# Altium PCB RX.PcbDoc (part 1 of 2)
Units mm, origin at the board's own origin, x right, y up, seen from the top; angles counter-clockwise.
Board outline 47 x 37 mm, 4 copper layers (Top Layer, Top Inner Layer, Bottom Inner Layer, Bottom Layer), stack 1.569 mm thick; 85 components, 65 nets, 311 pads, 196 vias.
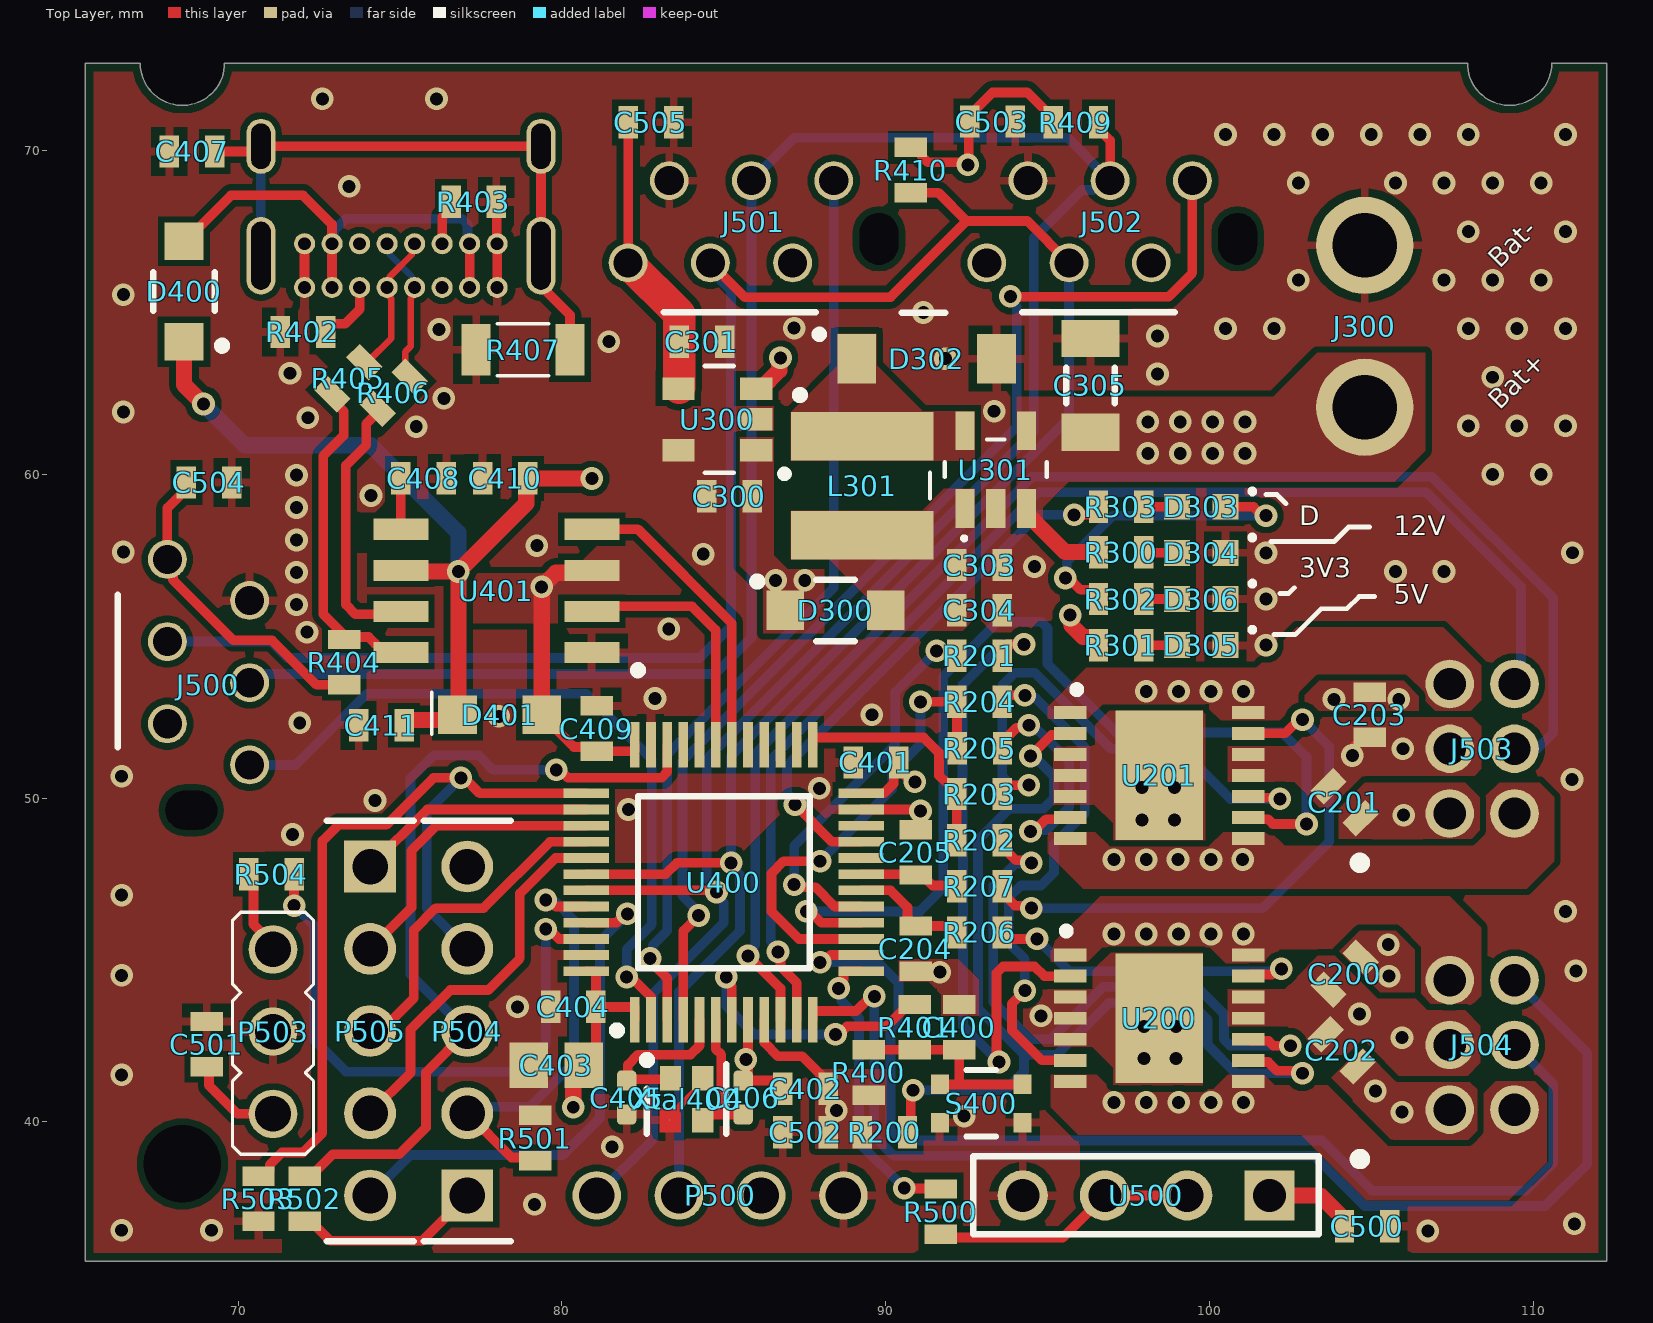
[diagram p0: Top Layer view]
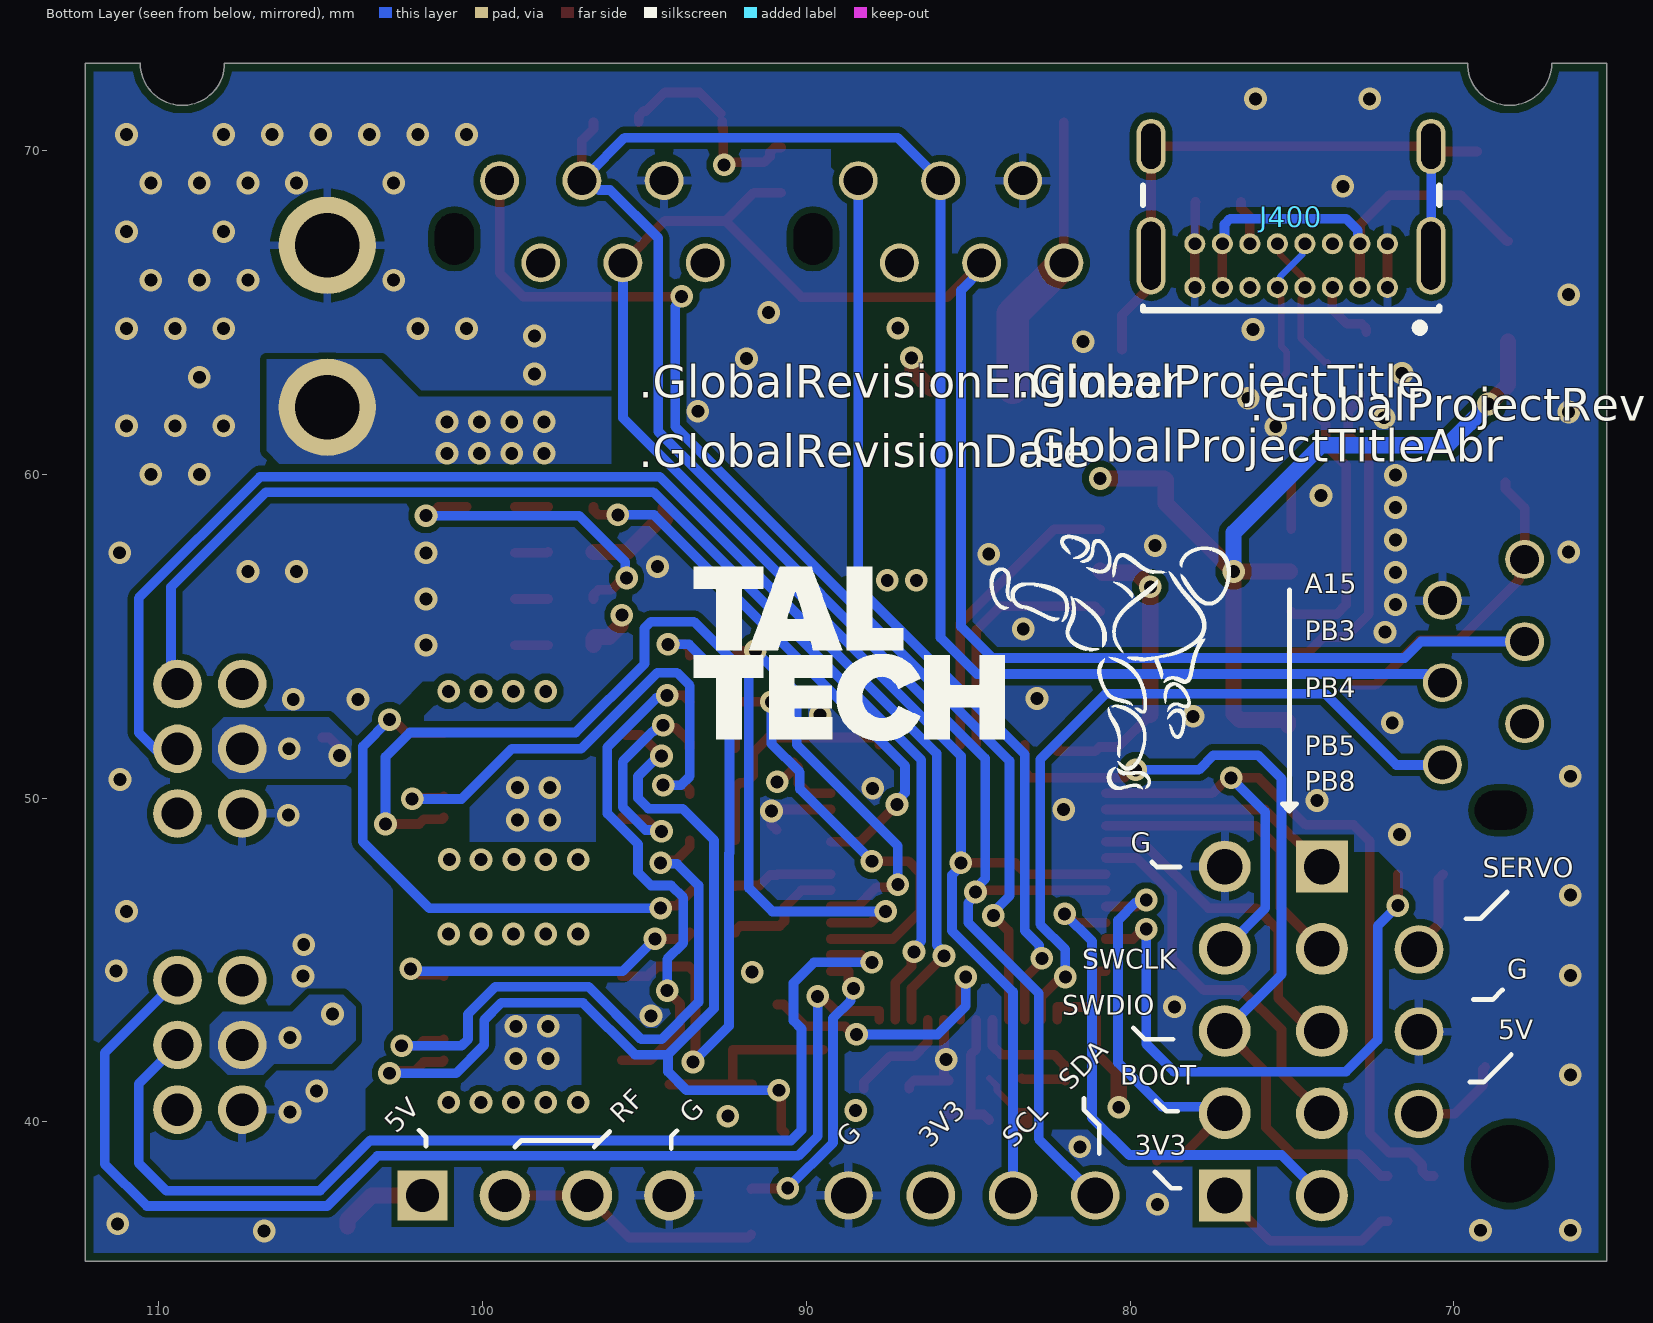
[diagram p1: Bottom Layer view, seen from below]
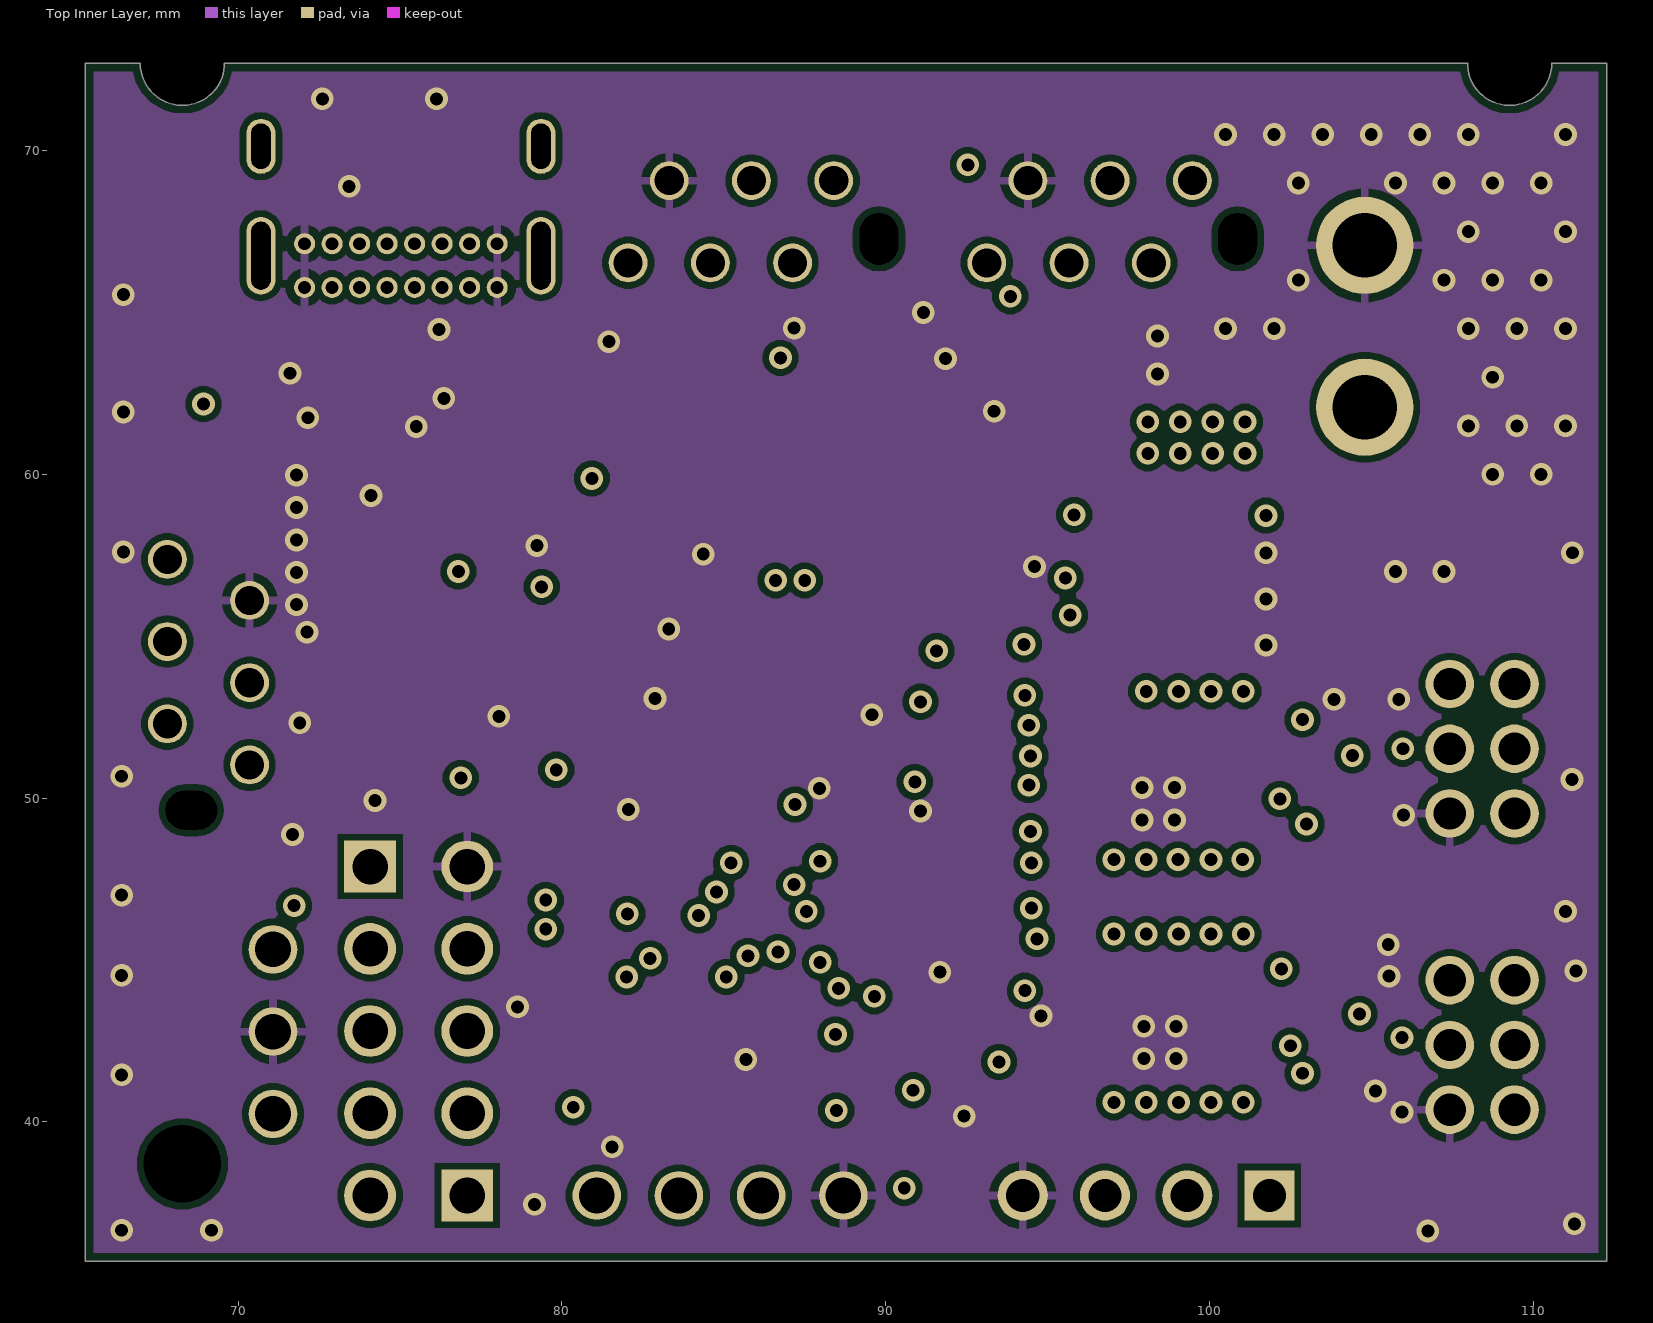
[diagram p2: Top Inner Layer]
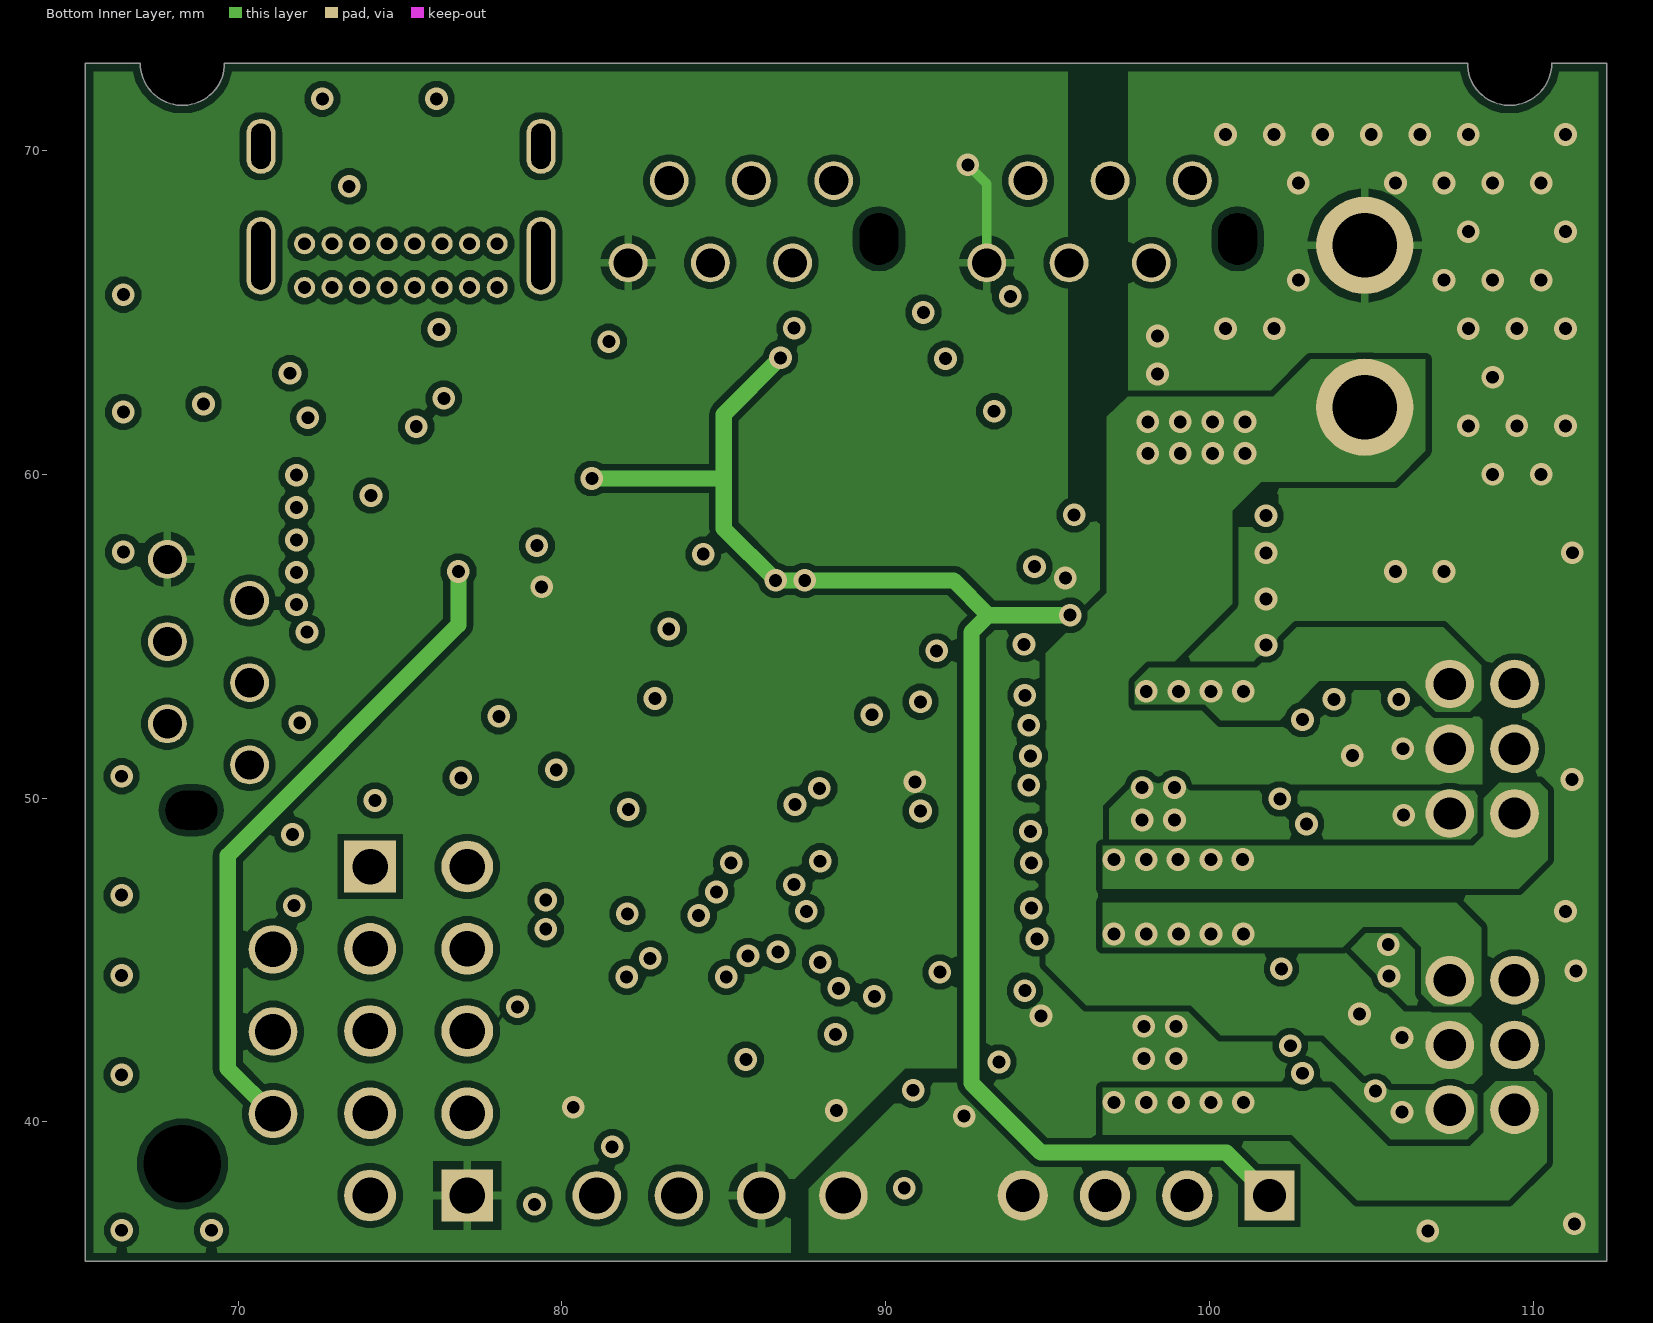
[diagram p3: Bottom Inner Layer]

## Layer stack, top to bottom
Top Solder: solder mask 0.0254, Solder Resist, Dk 3.8
Top Layer: signal copper 0.035
Dielectric 2: prepreg 0.0994, PP-006, Dk 4.1
Top Inner Layer: signal copper 0.0175
Dielectric 1: dielectric 1.265, FR-4, Dk 4.8
Bottom Inner Layer: signal copper 0.0175
Dielectric 3: prepreg 0.0994, PP-006, Dk 4.1
Bottom Layer: signal copper 0.035
Bottom Solder: solder mask 0.0254, Solder Resist, Dk 3.8

## Board outline
65.275,35.7 65.275,72.7 66.975,72.7 ccw(c68.275,72.7) 69.575,72.7 107.975,72.7 ccw(c109.275,72.7) 110.575,72.7 112.275,72.7 112.275,35.7

## Design rules (kind name [scope] priority, off if disabled: settings)
BoardOutlineClearance [All] p1: gap=0.254 ignorepadtopadclearanceinfootprint=FALSE except(0: Arc-SplitContinuation Track-SplitContinuation SMDPad-SplitContinuation THPad-SplitContinuation Via-SplitContinuation Fill-SplitContinuation Poly-SplitContinuation Region-SplitContinuation Text-SplitContinuation)
Clearance [All] p1: gap=0.2 ignorepadtopadclearanceinfootprint=TRUE except(0.1: Arc-SMDPad Track-SMDPad; 0.15: SMDPad-SMDPad; 0.16: Arc-Arc Arc-Track Track-Track; 0.3: Arc-THPad Track-THPad SMDPad-THPad THPad-THPad THPad-Via)
DiffPairsRouting [All] p1: maxlimit=0.4 minlimit=0.127 mostfreqgap=0.3 toplayer_mingap=0.2 toplayer_minwidth=0.2 toplayer_maxwidth=0.3 toplayer_prefwidth=0.25 midlayer1_maxgap=0.127 midlayer1_prefgap=0.127 midlayer1_minwidth=0.095 midlayer1_maxwidth=0.095 midlayer1_prefwidth=0.095 midlayer2_maxgap=0.127 midlayer2_prefgap=0.127 midlayer2_minwidth=0.095 midlayer2_maxwidth=0.095 midlayer2_prefwidth=0.095 bottomlayer_mingap=0.2 bottomlayer_minwidth=0.2 bottomlayer_maxwidth=0.3 bottomlayer_prefwidth=0.25 maxuncoupledlength=12.7
Height [All] p1: minheight=0 maxheight=30 prefheight=12.7
MinimumSolderMaskSliver [All] p1: minsoldermaskwidth=0
PlaneConnect [All] p1: pad.planeconnectstyle=Relief pad.reliefexpansion=0.508 pad.reliefentries=4 pad.reliefconductorwidth=0.254 pad.reliefairgap=0.254 via.planeconnectstyle=Direct via.reliefexpansion=0.508 via.reliefentries=4 via.reliefconductorwidth=0.254 via.reliefairgap=0.254
PolygonConnect MainPwr [All vs IsNamedPolygon('Main')] p1: connectstyle=Direct reliefconductorwidth=0.254 reliefentries=4 polygonreliefangle="90 Angle" airgapwidth=0.254
PolygonConnect [All] p2: thpad.connectstyle=Relief thpad.reliefconductorwidth=0.254 thpad.reliefentries=4 thpad.polygonreliefangle="90 Angle" thpad.airgapwidth=0.254 smdpad.connectstyle=Relief smdpad.reliefconductorwidth=0.254 smdpad.reliefentries=4 smdpad.polygonreliefangle="90 Angle" smdpad.airgapwidth=0.254 via.connectstyle=Direct via.reliefconductorwidth=0.254 via.reliefentries=4 via.polygonreliefangle="90 Angle" via.airgapwidth=0.254
RoutingVias [All] p1: holewidth=0.4 width=0.7 viastyle="Through Hole" minholewidth=0.3 minwidth=0.6 maxholewidth=1 maxwidth=1.5
SilkToSolderMaskClearance [IsPad] p1: minsilkscreentomaskgap=0.1 clearancetoexposedcopper=TRUE
SolderMaskExpansion IsVia [IsVia] p1: expansion=0 istentingtop=FALSE soldermaskfromhole=TRUE
SolderMaskExpansion [All] p2: expansion=0.102 istentingtop=FALSE
SupplyNets "Schematic Supply Nets_3" [InNet('+3V3')] p1: voltage=0.000
SupplyNets "Schematic Supply Nets_2" [InNet('+5V')] p2: voltage=0.000
SupplyNets "Schematic Supply Nets_1" [InNet('+12V')] p3: voltage=0.000
SupplyNets "Schematic Supply Nets" [InNet('GND')] p4: voltage=0.000
Width [All] p1: maxlimit=2 minlimit=0.16 preferedwidth=0.3
25 further rules are at their usual default settings.

## Classes and differential pairs
component class Power: C300 C301 C303 C304 C305 D300 D302 D303 D304 D305 D306 J300 L301 mx R300 R301 R302 R303 U300 U301
component class "MCU and USB-C": C400 C401 C402 C403 C404 C405 C406 C407 C408 C409 C410 C411 D400 D401 J400 R400 R401 R402 R403 R404 R405 R406 R407 R409 R410 S400 U400 U401 Xtal400
component class "Headers and Connectors": C500 C501 C502 C503 C504 C505 J500 J501 J502 J503 J504 P500 P503 P504 P505 R500 R501 R502 R503 R504 U500
component class "Motor driver": C200 C201 C202 C203 C204 C205 mx R200 R201 R202 R203 R204 R205 R206 R207 U200 U201
differential pair USB_D: +USB_D_P -USB_D_N
differential pair D: +D_P -D_N

## Components (designator, comment, footprint, x,y, rotation, side; value= is the part's Value field where it differs from the comment)
C200 "4.7u" MLCC_0603_M 104.175,44.575 r225 top value=4,7µF
C201 "4.7u" MLCC_0603_M 104.175,49.875 r135 top value=4,7µF
C202 "100n" MLCC_0603_M 104.095,42.205 r135 top value=100nF
C203 "100n" MLCC_0603_M 104.95,52.575 r270 top value=100nF
C204 "15p" MLCC_0603_M 90.925,45.35 r270 top value=15pF
C205 "15p" MLCC_0603_M 90.925,48.325 r90 top value=15pF
C300 "1u" MLCC_0603_M 85.175,59.325 r0 top value=1µF
C301 "1u" MLCC_0603_M 84.325,64.1 r180 top value=1µF
C303 "22u" MLCC_0603_M 92.9,57.2 r180 top value=22µF
C304 "22u" MLCC_0603_M 92.9,55.8 r180 top value=22µF
C305 "4.7u" MLCC_1206_M 96.325,62.75 r270 top value=4,7µF
C400 "100n" MLCC_0603_M 92.275,42.925 r270 top value=100nF
C401 "100n" MLCC_0603_M 89.7,51.1 r180 top value=100nF
C402 "100n" MLCC_0603_M 87.525,41.025 r180 top value=100nF
C403 "4.7u" MLCC_0805_M 79.825,41.75 r0 top value=4.7µF
C404 "100n" MLCC_0603_M 80.35,43.55 r180 top value=100nF
C405 "15p" MLCC_0402_M 82,40.75 r90 top value=15pF
C406 "15p" MLCC_0402_M 85.6,40.75 r270 top value=15pF
C407 "1n" MLCC_0603_M 68.575,69.975 r0 top value=1nF
C408 "1u" MLCC_0603_M 75.725,59.875 r0 top value=1µF
C409 "100n" MLCC_0603_M 81.075,52.15 r90 top value=100nF
C410 "1u" MLCC_0603_M 78.25,59.875 r0 top value=1µF
C411 "100n" MLCC_0603_M 74.425,52.25 r180 top value=100nF
C500 "100n" MLCC_0603_M 104.875,36.775 r0 top value=100nF
C501 "100n" MLCC_0603_M 69.025,42.4 r90 top value=100nF
C502 "100n" MLCC_0603_M 87.525,39.675 r180 top value=100nF
C503 "100n" MLCC_0603_M 93.3,70.9 r0 top value=100nF
C504 "100n" MLCC_0603_M 69.1,59.75 r0 top value=100nF
C505 "100n" MLCC_0603_M 82.75,70.875 r0 top value=100nF
D300 "MBR1020VL_R1_00001" FP-MBR1020VL_R1_00001-MFG 88.45,55.8 r0 top
D302 "VSSAF3M10HM3/H" VSSAF3M10HM3_H-Footprint-1 91.265,63.575 r0 top
D303 "Red" "0603 RED LED" 99.75,59 r0 top
D304 "Red" "0603 RED LED" 99.75,57.575 r0 top
D305 "Red" "0603 RED LED" 99.75,54.725 r0 top
D306 "Red" "0603 RED LED" 99.75,56.15 r0 top
D400 "MBR1020VL_R1_00001" FP-MBR1020VL_R1_00001-MFG 68.325,65.65 r90 top
D401 "1N5817G" "SOD-323 based on 1N5817WS" 78.075,52.575 r0 top
J300 "XT30U-F" XT30U-F 104.8,64.575 r180 top
J400 "USB4085-GF-A" FP-USB4085-GF-A-MFG 75.025,69.8 r0 bottom
J500 "7-215079-6" 7-215079-6-Footprint-1 67.81,57.375 r270 top
J501 "7-215079-6" 7-215079-6-Footprint-1 82.045,66.535 r0 top
J502 "7-215079-6" 7-215079-6-Footprint-1 93.125,66.535 r0 top
J503 "0878310641" 0878310641 108.425,51.525 r90 top
J504 "0878310641" 0878310641 108.425,42.375 r90 top
L301 "74404043220A" WE-LQS_4025 89.275,59.65 r270 top value=22µH
P500 "PH1-04-UA" "4Pos Pin Header Vertical" 84.885,37.725 r180 top
P503 "M20-9990345" "3Pos Pin Header" 71.075,42.805 r90 top
P504 "61300511121" 61300511121 77.075,42.805 r90 top
P505 "61300511121" 61300511121 74.075,42.805 r270 top
R200 "2k" Resistor_0603_M 89.975,39.675 r180 top
R201 "22R" Resistor_0603_M 92.9,54.4 r0 top value=22
R202 "22R" Resistor_0603_M 92.9,48.7 r0 top value=22
R203 "22R" Resistor_0603_M 92.9,50.125 r0 top value=22
R204 "22R" Resistor_0603_M 92.9,52.975 r0 top value=22
R205 "22R" Resistor_0603_M 92.908,51.544 r0 top value=22
R206 "22R" Resistor_0603_M 92.9,45.85 r0 top value=22
R207 "22R" Resistor_0603_M 92.9,47.275 r0 top value=22
R300 "680R" Resistor_0603_M 97.275,57.6 r180 top value=680
R301 "200R" Resistor_0603_M 97.275,54.725 r0 top value=200
R302 "100R" Resistor_0603_M 97.275,56.15 r180 top value=100
R303 "200R" Resistor_0603_M 97.275,59 r0 top value=200
R400 "10k" Resistor_0603_M 89.475,41.525 r270 top
R401 "100R" Resistor_0603_M 90.9,42.925 r90 top value=100
R402 "5.1k" Resistor_0603_M 72,64.4 r180 top value=5,1k
R403 "5.1k" Resistor_0603_M 77.275,68.425 r180 top value=5,1k
R404 "1.5k" Resistor_0603_M 73.275,54.2 r270 top value=1,5k
R405 "22R" Resistor_0603_M 73.4,62.975 r225 top value=22
R406 "22R" Resistor_0603_M 74.8,62.525 r225 top value=22
R407 "1M" Resistor_1206_M 78.8,63.85 r180 top
R409 "4.7k" Resistor_0603_M 95.875,70.875 r180 top value=4,7k
R410 "4.7k" Resistor_0603_M 90.775,69.4 r90 top value=4,7k
R500 "22R" Resistor_0603_M 91.7,37.225 r270 top value=22
R501 "10k" Resistor_0603_M 79.175,39.5 r270 top
R502 "10k" Resistor_0603_M 72.05,37.625 r90 top
R503 "10k" Resistor_0603_M 70.625,37.625 r90 top
R504 "100R" Resistor_0603_M 71.025,47.65 r0 top value=100
S400 "USLPT2819DT4TR" USLPT2819DT4TR-Footprint-1 92.95,40.575 r180 top
U200 "BTM9011EPXUMA1" BTM9011EPXUMA1 98.45,43.2 r0 top
U201 "BTM9011EPXUMA1" BTM9011EPXUMA1 98.45,50.7 r0 top
U300 "NCP115ASN330T2G" TSOP-5 84.8,61.7 r180 top
U301 "RAA2118054GP3#JA0" P5_064B_MFG 93.4,60.15 r90 top
U400 "STM32F103C8T6" STM-LQFP48_M 85,47.4 r90 top
U401 "HT42B534-2" "SOP-8 150mil" 77.975,56.4 r180 top
U500 "XY-MK-5V RF" "2.54mm 4 POS XY-MK-5V RF" 101.855,37.725 r180 top
Xtal400 "ABM11-16.000MHZ-12-N1G-T" FP-ABM11-MFG 83.85,40.7 r270 top

## Footprints (in the part's own frame and the unit in brackets; to place one, negate y for a bottom-side part, rotate by r counter-clockwise, add the part's x,y. Pads: shape width x height; smd on the part's side, far side on the other; paste and mask are expansions set on the pad)
"2.54mm 4 POS XY-MK-5V RF" [mm] "Elevated Socket, 1x5 Pins, Vertical, 2.54mm Pitch, Female"
  rect 1.55x1.55 hole 1.02: 1(0,0)
  round 1.55 hole 1.02: 2(2.54,0) 3(5.08,0) 4(7.62,0)
  silkscreen extent -1.53,-1.2 9.14,1.2, body extent -20.98,2.21 9.02,21.41, height 6.1
"3Pos Pin Header" [mm]
  round 1.5 hole 1.1: 1(-2.56,0) 2(-0.02,0) 3(2.52,0)
  silkscreen extent -3.81,-1.25 3.67,1.25, body extent -3.89,-1.24 3.73,1.25, height 8.57
"4Pos Pin Header Vertical" [mm]
  round 1.5 hole 1.1: 1(-3.81,0) 2(-1.27,0) 3(1.27,0) 4(3.81,0)
  body extent -5.08,-1.27 5.08,1.27, height 8.57
7-215079-6-Footprint-1 [mm]
  round 0 hole 1.2 slot 1.6 at 90 deg unplated: 0(7.75,0.74)
  round 1.2 hole 0.9: 1(0,0) 2(1.27,2.54) 3(2.54,0) 4(3.81,2.54) 5(5.08,0) 6(6.35,2.54)
  silkscreen extent 1.1,-1.53 5.8,-1.53, body extent -1.6,-1.38 7.96,3.62, height 4
"0603 RED LED" [mm] "Generic 0603 RED LED"
  rect 0.8x0.8 smd: 1(0.75,0) 2(-0.75,0)
  silkscreen extent 1.55,0.45 1.6,0.5, body extent -0.8,-0.4 0.8,0.4, height 0.4
0878310641 [mm]
  round 1.5 hole 1: 1(-2,1) 2(0,1) 3(2,1) 4(-2,-1) 5(0,-1) 6(2,-1)
  silkscreen extent -3.67,3.62 -3.38,3.92, body extent -4.31,-3.14 4.34,3.16, height 6.4
61300511121 [mm] "Pin Header, pitch 2.54 mm, THT, Vertical, single row, 5p"
  rect 1.6x1.6 hole 1.1: 1(-5.08,0)
  round 1.6 hole 1.1: 2(-2.54,0) 3(0,0) 4(2.54,0) 5(5.08,0)
  silkscreen extent -6.5,-1.35 6.5,1.35, body extent -6.35,-1.27 6.35,1.27, height 8.57
BTM9011EPXUMA1 [mm]
  rect 1x0.4 smd: 1(-2.75,1.95) 2(-2.75,1.3) 3(-2.75,0.65) 4(-2.75,0) 5(-2.75,-0.65) 6(-2.75,-1.3) 7(-2.75,-1.95) 8(2.75,-1.95) 9(2.75,-1.3) 10(2.75,-0.65) 11(2.75,0) 12(2.75,0.65) 13(2.75,1.3) 14(2.75,1.95)
  rect 2.7x4 smd: 15(0,0)
  silkscreen extent -2.97,2.59 -2.77,2.8, body extent -3,-2.45 3,2.45, height 1.16
FP-ABM11-MFG [mm]
  rect 0.75x0.65 smd paste+0 mask+0: 1(-0.65,-0.5) 3(0.65,0.5) 4(-0.65,0.5)
  round 0.025 smd paste+0 mask+0: 2(0.65,-0.525)
  Top Layer region: 0.275,-0.325 0.425,-0.175 1.025,-0.175 1.025,-0.825 0.275,-0.825
  silkscreen extent -1.33,-1.35 1.07,1.22, body extent -1.17,-0.97 1.17,0.97, height 0.25
FP-MBR1020VL_R1_00001-MFG [mm]
  rect 1.15x1.22 smd paste+0 mask+0: 1(-1.55,0) 2(1.55,0)
  silkscreen extent -2.54,-0.95 0.6,1.01, body extent -2.22,-1.05 2.22,1.05, height 0.25
FP-USB4085-GF-A-MFG [mm]
  rrect100% 0.9x2.4 hole 2.1 slot 0.6 at 0 deg paste-2539.97 mask+0: 1(-4.325,3.045) 2(4.325,3.045)
  rrect100% 0.9x1.7 hole 1.4 slot 0.6 at 0 deg paste-2539.97 mask+0: 3(-4.325,-0.335) 4(4.325,-0.335)
  round 0.65 hole 0.4 paste-2539.97 mask+0: A1(-2.975,4.025) A4(-2.125,4.025) A5(-1.275,4.025) A6(-0.425,4.025) A7(0.425,4.025) A8(1.275,4.025) A9(2.125,4.025) A12(2.975,4.025) B1(2.975,2.675) B4(2.125,2.675) B5(1.275,2.675) B6(0.425,2.675) B7(-0.425,2.675) B8(-1.275,2.675) B9(-2.125,2.675) B12(-2.975,2.675)
  silkscreen extent -4.57,0.89 4.57,5.39, body extent -4.51,-4.6 4.51,4.57, height 3.46
MLCC_0402_M [mm]
  rrect49% 0.63x0.61 smd: 1(-0.525,0) 2(0.525,0)
  body extent -0.5,-0.25 0.5,0.25, height 0.55
MLCC_0603_M [mm]
  rect 0.6x1 smd: 1(-0.7,0) 2(0.7,0)
  body extent -0.8,-0.4 0.8,0.4, height 0.92
MLCC_0805_M [mm] "Chip Capacitor, 2-Leads, Body 2,00x1,25mm, IPC Medium Density"
  rect 1.2x1.4 smd: 1(-0.85,0) 2(0.85,0)
  body extent -1.05,-0.67 1.05,0.67, height 1.35
MLCC_1206_M [mm]
  rect 1.15x1.8 smd: 1(-1.45,0) 2(1.45,0)
  silkscreen extent -0.55,-0.75 0.55,0.75, body extent -1.7,-0.9 1.7,0.9, height 0.75
P5_064B_MFG [mm] "Recommended Land Pattern"
  rect 1.2x0.6 smd paste+0 mask+0: 1(-1.2,0.95) 2(-1.2,0) 3(-1.2,-0.95) 4(1.2,-0.95) 5(1.2,0.95)
  silkscreen extent -2.19,-1.58 0.92,1.58, body extent -1.4,-1.45 1.4,1.45, height 1.1
Resistor_0603_M [mm]
  rect 0.6x1 smd: 1(-0.7,0) 2(0.7,0)
  body extent -0.8,-0.4 0.8,0.4, height 0.45
Resistor_1206_M [mm]
  rect 0.9x1.6 smd: 1(-1.45,0) 2(1.45,0)
  silkscreen extent -0.8,-0.8 0.8,0.8, body extent -1.6,-0.83 1.6,0.83, height 0.56
"SOD-323 based on 1N5817WS" [mm] "SOD-323 based on 1N5817WS"
  rect 1.2x1.2 smd: 1(-1.3,0) 2(1.3,0)
  silkscreen extent -2.1,-0.6 -2.1,0.7, body extent -1.3,-0.67 1.3,0.68, height 1.1
"SOP-8 150mil" [mm]
  rect 1.7x0.65 smd: 1(-2.95,1.905) 2(-2.95,0.635) 3(-2.95,-0.635) 4(-2.95,-1.905) 5(2.95,-1.905) 6(2.95,-0.635) 7(2.95,0.635) 8(2.95,1.905)
  silkscreen extent -4.5,2.33 -4.25,2.57, body extent -3.1,-2.5 3.1,2.5, height 1.83
STM-LQFP48_M [mm] "QFP, 48-Leads, Body 7x7mm, Pitch 0.5mm, IPC Low Density"
  rect 1.4x0.3 smd: 1(-4.25,2.75) 2(-4.25,2.25) 3(-4.25,1.75) 4(-4.25,1.25) 5(-4.25,0.75) 6(-4.25,0.25) 7(-4.25,-0.25) 8(-4.25,-0.75) 9(-4.25,-1.25) 10(-4.25,-1.75) 11(-4.25,-2.25) 12(-4.25,-2.75) 25(4.25,-2.75) 26(4.25,-2.25) 27(4.25,-1.75) 28(4.25,-1.25) 29(4.25,-0.75) 30(4.25,-0.25) 31(4.25,0.25) 32(4.25,0.75) 33(4.25,1.25) 34(4.25,1.75) 35(4.25,2.25) 36(4.25,2.75)
  rect 0.3x1.4 smd: 13(-2.75,-4.25) 14(-2.25,-4.25) 15(-1.75,-4.25) 16(-1.25,-4.25) 17(-0.75,-4.25) 18(-0.25,-4.25) 19(0.25,-4.25) 20(0.75,-4.25) 21(1.25,-4.25) 22(1.75,-4.25) 23(2.25,-4.25) 24(2.75,-4.25) 37(2.75,4.25) 38(2.25,4.25) 39(1.75,4.25) 40(1.25,4.25) 41(0.75,4.25) 42(0.25,4.25) 43(-0.25,4.25) 44(-0.75,4.25) 45(-1.25,4.25) 46(-1.75,4.25) 47(-2.25,4.25) 48(-2.75,4.25)
  silkscreen extent -4.7,-2.65 2.65,3.42, body extent -3.5,-3.5 3.5,3.5, height 1.6
TSOP-5 [mm] "SOT-23-5, 5-Leads, Body 3.0x1.5mm, Pitch 0.95mm, IPC High Density"
  rect 1x0.7 smd: 1(-1.2,0.95) 2(-1.2,0) 3(-1.2,-0.95) 4(1.2,-0.95) 5(1.2,0.95)
  silkscreen extent -2.17,-1.65 0.38,1.78, body extent -1.38,-1.47 1.37,1.53, height 1.1
USLPT2819DT4TR-Footprint-1 [mm]
  rect 0.55x0.6 smd: 1(-1.275,0.6) 2(1.275,0.6) 3(-1.275,-0.59) 4(1.275,-0.59)
  silkscreen extent -0.46,-1.02 0.46,1.03, body extent -1.5,-0.94 1.5,0.96, height 0.43
VSSAF3M10HM3_H-Footprint-1 [mm]
  rect 1.2x1.52 smd: 1(-2.16,0) 2(2.16,0)
  silkscreen extent -3.43,0.64 0.58,1.43, body extent -2.59,-1.29 2.61,1.31, height 1
WE-LQS_4025 [mm] "SMD Power Inductor, 2-Leads, body 4x4mm"
  rect 1.5x4.4 smd: 1(-1.525,0) 2(1.525,0)
  silkscreen extent -0.4,2.1 0.4,2.1, body extent -2,-2 2,2, height 2.15
XT30U-F [mm]
  round 3 hole 2: 1(0,2.5) 2(0,-2.5)
  body extent -2.8,-5.44 2.82,5.43, height 9.67

## Part data
C200 C201: library part CMP-001-1257-1, "MLCC, 0603, 4.7u, 10%, 35V, X5R", Capacitor Type=Ceramic, Case/Package=0603, Dielectric=X5R, Manufacturer=Any, Tolerance=10%, Voltage=35V, Mount=SMD, Part number="MLCC, 0603, 4.7u, 10%, 35V, X5R", RoHS=Yes
C202 C203: library part CMP-001-0755-1, "MLCC, 0603, 100n, 10%, 35V, X7R", Capacitor Type=Ceramic, Case/Package=0603, Dielectric=X7R, Manufacturer=Any, Tolerance=10%, Voltage=35V, Mount=SMD, Part number="MLCC, 0603, 100n, 10%, 35V, X7R", RoHS=Yes
C204 C205: library part CMP-001-0474-1, "MLCC, 0603, 15p, 5%, 50V, C0G/NP0", Capacitor Type=Ceramic, Case/Package=0603, Dielectric=C0G/NP0, Manufacturer=Any, Tolerance=5%, Voltage=50V, Mount=SMD, Part number="MLCC, 0603, 15p, 5%, 50V, C0G/NP0", RoHS=Yes
C300 C301 C408 C410: library part CMP-001-0565-1, "MLCC, 0603, 1u, 10%, 50V, X5R", Capacitor Type=Ceramic, Case/Package=0603, Dielectric=X5R, Manufacturer=Any, Tolerance=10%, Voltage=50V, Mount=SMD, Part number="MLCC, 0603, 1u, 10%, 50V, X5R", RoHS=Yes
C303 C304: library part CMP-001-1264-1, "MLCC, 0603, 22u, 10%, 16V, X5R", Capacitor Type=Ceramic, Case/Package=0603, Dielectric=X5R, Manufacturer=Any, Tolerance=10%, Voltage=16V, Mount=SMD, Part number="MLCC, 0603, 22u, 10%, 16V, X5R", RoHS=Yes
C305: library part CMP-001-1124-2, "MLCC, 1206, 4.7u, 10%, 35V, X5R", Capacitor Type=Ceramic, Case/Package=1206, Dielectric=X5R, Manufacturer=Any, Tolerance=10%, Voltage=35V, Mount=SMD, Part number="MLCC, 1206, 4.7u, 10%, 35V, X5R", RoHS=Yes
C400 C401 C402 C404 C409 C411 C500 C501 C502 C503 C504 C505: library part CMP-001-0815-1, "MLCC, 0603, 100n, 10%, 50V, X7R", Capacitor Type=Ceramic, Case/Package=0603, Dielectric=X7R, Manufacturer=Any, Tolerance=10%, Voltage=50V, Mount=SMD, Part number="MLCC, 0603, 100n, 10%, 50V, X7R", RoHS=Yes
C403: library part CMP-001-1830-1, "MLCC, 0805, 4.7u, 20%, 50V, X5R", Capacitor Type=Ceramic, Case/Package=0805, Dielectric=X5R, Manufacturer=Any, Tolerance=20%, Voltage=50V, Mount=SMD, Part number="MLCC, 0805, 4.7u, 20%, 50V, X5R", RoHS=Yes
C405 C406: library part CMP-001-1853-1, "MLCC, 0402, 15p, 10%, 25V, C0G/NP0", Capacitance=15pF, Capacitor Type=Ceramic, Case Code (Imperial)=0402, Case Code (Metric)=1005, Dielectric=C0G, Manufacturer=Any, Max Operating Temperature=125°C, Min Operating Temperature=-55°C, Package Quantity=1, Temperature Coefficient=300ppm/°C, Tolerance=10%, Voltage=25V, Voltage Rating=25, Case/Package=0402, Contact Plating=Tin, Depth=0.5mm, Height=0.5mm, Length=1mm, Material=Ceramic, Mount="Surface Mount", Packaging="Tape and Reel", Part number="MLCC, 0402, 15p, 10%, 25V, C0G/NP0", Radiation Hardening=No, RoHS=Yes, Thickness=0.022inch, Width=0.02inch
C407: library part CMP-001-0547-1, "MLCC, 0603, 1n, 10%, 50V, X5R", Capacitor Type=Ceramic, Case/Package=0603, Dielectric=X5R, Manufacturer=Any, Tolerance=10%, Voltage=50V, Mount=SMD, Part number="MLCC, 0603, 1n, 10%, 50V, X5R", RoHS=Yes
D300 D400: library part CMP-ROOT-01310-1, "Rectifier Diode, Schottky, 1 Phase, 1 Element, 1A, 20V V(RRM), Silicon", Case/Package=SOD-123FL, Forward Current=1A, Manufacturer=Panjit, Max Forward Surge Current (Ifsm)=45A, Max Junction Temperature (Tj)=125°C, Max Repetitive Reverse Voltage (Vrrm)=20V, Min Operating Temperature=-55°C, Peak Reverse Current=600µA, Height=1.1mm, Lifecycle Status=Production, Max Operating Temperature=125°C, Max Output Current=1A, Mount=SMD, Number of Elements=1, Number of Terminals=2, Part number=MBR1020VL_R1_00001, Pins=2, REACH SVHC=No, Reverse Standoff Voltage=20V, RoHS=Compliant
D302: library part CMP-ROOT-01308-1, "Rectifier Diode, Schottky, 1 Phase, 1 Element, 2.3A, 100V V(RRM), Silicon, DO-221AC", Case/Package=DO-221AC-2, Forward Voltage=720mV, Max Forward Surge Current (Ifsm)=80A, Max Operating Temperature=175°C, Max Output Current=2.3A, Min Operating Temperature=-40°C, Peak Reverse Current=200µA, Reverse Standoff Voltage=100V, Lifecycle Status=Production, Manufacturer=VSSAF3M10HM3/H, Mount=SMD, Number of Elements=1, Number of Terminals=2, Part number=VSSAF3M10HM3/H, Pins=2, REACH SVHC=No, RoHS=Compliant
D303 D304 D305 D306: library part CMP-ROOT-00025-2, "Generic red 0603 LED", Case/Package=0603, Manufacturer=Any, Part number="Any Red 0603 LED", Color=Red, Mount=SMD, RoHS=Yes
D401: library part CMP-ROOT-01323-1, "Rectifier Diode, Schottky, 1 Phase, 1 Element, 1A, 20V V(RRM), Silicon, DO-204AL", Average Rectified Current=1A, Breakdown Voltage=20V, Case/Package=Axial, Forward Voltage=320mV, Manufacturer="TWGMC / onsemi", Manufacturer Lifecycle Status=ACTIVE, Max Forward Surge Current (Ifsm)=25A, Max Operating Temperature=125°C, Min Operating Temperature=-65°C, Part number=1N5817WS, Peak Reverse Current=1mA, China RoHS=Non-Compliant, Country of Origin="Mainland China", Current Rating=1A, Diameter=2.7mm, Element Configuration=Single, Export Control Classification Number (ECCN) Code=EAR99, Forward Current=1A, Halogen Free="Halogen Free", Harmonized Tariff Schedule (HTS) Code=8541.10.00.80, Height=2.7mm, Introduction Date=1997-05-06, Lead Free="Lead Free", Length=5.1816mm, Lifecycle Status=Production, Max Output Current=1A, Max Repetitive Reverse Voltage (Vrrm)=20V, Max Reverse Voltage (DC)=20V, Mount=SMD, Number of Elements=1, Number of Terminals=2, Output Current=1A, Packaging=Bulk, Peak Non-Repetitive Surge Current=25A, Pins=2, Polarity=Standard, Radiation Hardening=No, REACH SVHC=No, Reverse Standoff Voltage=20V, RoHS=Compliant, Schedule B="8541100080, 8541100080", Voltage Rating (DC)=20V, Weight=4.535924g, Width=2.7mm
J300: library part CMP-ROOT-01262-3, "Power Connector", Case/Package=Non-standard, Color=Yellow, Manufacturer=AMASS, Contact Material=Brass, Mount=SMD, Orientation=Straight, Part number=XT30U-F, Pins=2, RoHS=Yes
J400: library part CMP-001-1800-1, "USB Connector, 16 Contact(s), Female, Right Angle, Solder Terminal, Locking, Receptacle", Current Rating=4.25A, Flammability Rating="UL94 V-0", Insulation Color=Black, Manufacturer=GCT, Max Operating Temperature=85°C, Min Operating Temperature=-40°C, Part number=USB4800-03-A, Voltage Rating=20V, Connector Type=USB, Contact Material="Copper Alloy", Contact Plating=Gold, Gender=Receptacle, Height=3.66mm, Mating Cycles=10000, Mount=TH, Mounting Technology="Through Hole,Horizontal", Number of Contacts=16, Number of Ports=1, Number of Positions=16, Orientation="Right Angle", Packaging="Tape and Reel", Pins=16, RoHS=Yes, Series=USB4085, Shielding=Shielded, Standoff Height=3.5mm, Termination=Solder, USB PD=3.2, USB Standard="USB 2.0"
J500 J501 J502: library part CMP-ROOT-01311-2, "Conn FFC Connector F 6 POS 1.27mm Solder ST Thru-Hole Automotive Box/Carton", Color=Red, Contact Current Rating=1A, Contact Resistance=10mΩ, Insulation Resistance=1GΩ, Manufacturer="TE Connectivity", Manufacturer Lifecycle Status=ACTIVE, Max Operating Temperature=105°C, Min Operating Temperature=-40°C, Operating Force=4.8928N, Operating Supply Voltage=100V, China RoHS=Compliant, Contact Gender=Female, Contact Material="Nickel, Tin", Contact Plating=Tin, Current Rating=1A, Height=4.2mm, Housing Color=Red, Insulation Material=Thermoplastic, Lead Free="Lead Free", Lead Pitch=1.27mm, Length=9.7mm, Lifecycle Status=Production, Mating Connector Lock=Without, Mount=TH, Mounting Technology="Through Hole", Number of Contacts=6, Number of Ports=1, Number of Positions=6, Number of Rows=2, Orientation=Vertical, Packaging=Box, Part number=7-215079-6, PCB Mount Retention=With, Pins=6, Plating Thickness=4.99999µm, REACH SVHC=Yes, RoHS=Compliant, Row Spacing=2.54mm, Shielding=No, Terminal Pitch=1.27mm, Voltage Rating=100V, Voltage Rating (DC)=100V
J503 J504: library part CMP-ROOT-01318-3, "Conn Shrouded Header (2 Sides) HDR 6 POS 2mm Solder ST Top Entry Thru-Hole Milli-Grid Tube", Current Rating=2A, Dielectric Material=Polyamide, Insulation Resistance=1GΩ, Manufacturer=Molex, Manufacturer Lifecycle Status=ACTIVE, Max Operating Temperature=105°C, Min Operating Temperature=-55°C, Operating Force=1.9N, China RoHS=Compliant, Contact Gender=Male, Contact Plating=Gold, Export Control Classification Number (ECCN) Code=EAR99, Harmonized Tariff Schedule (HTS) Code=8536.69.40.40, Introduction Date=2014-01-28, Lifecycle Status=Production, Mount=TH, Number of Circuits=6, Number of Rows=2, Orientation=Vertical, Part number=0878310641, Pins=6, Plating=Tin, Plating Thickness=762nm, REACH SVHC=Yes, RoHS=Compliant, Row Spacing=2mm, Schedule B="8536694040, 8536694040", Terminal Pitch=2mm
L301: library part CMP-ROOT-01309-1, "General Purpose Inductor, 22uH, 20%, 1 Element, Nickel-zinc Ferrite-Core, SMD, 1616", Ambient Temperature Range High=85°C, Ambient Temperature Range Low=-40°C, Case/Package="4mm x 4mm", Current Rating=1.11A, DC Resistance (DCR)=200mΩ, Inductance Tolerance=20%, Manufacturer="Wurth Elektronik", Max Operating Temperature=125°C, Height=2.5mm, Length=4mm, Min Operating Temperature=-40°C, Mount=SMD, Part number=74404043220A, Pins=2, RoHS=Compliant, Width=4mm
P500: library part CMP-002-000004-1, "4 POS 2.54mm Vertical THT Header", Manufacturer="Adam Tech", Lead Free="Lead Free", Mount=TH, Number of Positions=4, Part number=PH1-04-UA, Pins=4, Pitch=2.54mm, RoHS=Yes, Termination="Through Hole"
P503: library part CMP-ROOT-00217-1, "Connector Header Through Hole 3 position 0.100\" (2.54mm)", Case/Package=SIL, Color=Black, Contact Resistance=25mR, Current Rating=3A, Insulation Resistance=10GR, Manufacturer="Harwin Inc.", Max Operating Temperature=105°C, Min Operating Temperature=-40°C, Package Quantity=1000, Voltage Rating (AC)=750V, Connector Type="Male Pin", Contact Material=Brass,Bronze, Contact Mating Length=0.24inch, Contact Plating=Gold, Depth=2.54mm, Height=0.125inch, Housing Color=Black, Housing Material=Nylon, Length=7.62mm, Max Current Rating=3A, Mount="Through Hole", Number of Contacts=3, Number of Positions=3, Number of Rows=1, Orientation=Straight, Packaging=Bulk, Part number=M20-9990345, Pins=3, Pitch=2.54mm, Radiation Hardening=No, REACH SVHC="No SVHC", RoHS=Yes, Termination=Solder, Weight=0.006138oz, Width=0.25inch
P504 P505: library part CMP-ROOT-01020-1, "Conn Unshrouded Header HDR 5 POS 2.54mm Solder ST Top Entry Thru-Hole Bag", Manufacturer=Wurth, Mount=TH, Part number=61300511121, RoHS=Yes
R200: library part CMP-001-0084-2, "Resistor, 0603, 2k, 1%, 1/10W", Case/Package=0603, Manufacturer=Any, Power=100mW, Tolerance=1%, Mount=SMD, Part number="Resistor, 0603, 2k, 1%, 1/10W", RoHS=Yes
R201 R202 R203 R204 R205 R206 R207 R405 R406 R500: library part CMP-001-0038-3, "Resistor, 0603, 22R, 1%, 1/10W", Case/Package=0603, Manufacturer=Any, Power=100mW, Tolerance=1%, Mount=SMD, Part number="Resistor, 0603, 22R, 1%, 1/10W", RoHS=Yes
R300: library part CMP-001-0074-3, "Resistor, 0603, 680R, 1%, 1/10W", Case/Package=0603, Manufacturer=Any, Power=100mW, Tolerance=1%, Mount=SMD, Part number="Resistor, 0603, 680R, 1%, 1/10W", RoHS=Yes
R301 R303: library part CMP-001-0060-2, "Resistor, 0603, 200R, 1%, 1/10W", Case/Package=0603, Manufacturer=Any, Power=100mW, Tolerance=1%, Mount=SMD, Part number="Resistor, 0603, 200R, 1%, 1/10W", RoHS=Yes
R302: library part CMP-0001-00262-1, "Resistor, 0603, 100R, ≤5%, ≥1/16W", Case/Package=0603, Manufacturer=Any, Mount=SMD, Part number="Resistor, 0603, 100R, ≤5%, ≥1/16W", RoHS=Yes
R400 R502 R503: library part CMP-001-0101-2, "Resistor, 0603, 10k, 1%, 1/10W", Case/Package=0603, Manufacturer=Any, Power=100mW, Tolerance=1%, Mount=SMD, Part number="Resistor, 0603, 10k, 1%, 1/10W", RoHS=Yes
R401 R504: library part CMP-001-0054-5, "Resistor, 0603, 100R, 1%, 1/10W", Case/Package=0603, Manufacturer=Any, Power=100mW, Tolerance=1%, Mount=SMD, Part number="Resistor, 0603, 100R, 1%, 1/10W", RoHS=Yes
R402 R403: library part CMP-001-0094-2, "Resistor, 0603, 5.1k, 1%, 1/10W", Case/Package=0603, Manufacturer=Any, Power=100mW, Tolerance=1%, Mount=SMD, Part number="Resistor, 0603, 5.1k, 1%, 1/10W", RoHS=Yes
R404: library part CMP-001-0081-2, "Resistor, 0603, 1.5k, 1%, 1/10W", Case/Package=0603, Manufacturer=Any, Power=100mW, Tolerance=1%, Mount=SMD, Part number="Resistor, 0603, 1.5k, 1%, 1/10W", RoHS=Yes
R407: library part CMP-0001-00051-1, "Resistor, 1206, 1M, 1%, 1/4W", Case/Package=1206, Manufacturer=Any, Mount=SMD, Part number=Any, RoHS=Yes
R409 R410: library part CMP-001-0093-2, "Resistor, 0603, 4.7k, 1%, 1/10W", Case/Package=0603, Manufacturer=Any, Power=100mW, Tolerance=1%, Mount=SMD, Part number="Resistor, 0603, 4.7k, 1%, 1/10W", RoHS=Yes
R501: library part CMP-0001-00257-1, "Resistor, 0603, 10k, ≤5%, ≥1/16W", Case/Package=0603, Manufacturer=Any, Mount=SMD, Part number="Resistor, 0603, 10k, ≤5%, ≥1/16W", RoHS=Yes
S400: library part CMP-ROOT-01290-1, "Keypad Switch, SPST, 0.05A, 1.96N, Solder Terminal, Panel Mount", Case/Package=Non-standard, Color=Black, Contact Current Rating=50mA, Manufacturer="TE Connectivity ALCOSWITCH Switches", Max Operating Temperature=85°C, Min Operating Temperature=-40°C, Operating Force=1.96N, China RoHS=Compliant, Contact Material="Stainless Steel", Contact Plating=Silver, Housing Material=Polyethylene, Lifecycle Status=Production, Max Current Rating=50mA, Mount=SMD, Packaging="Tape & Reel", Part number=USLPT2819DT4TR, REACH SVHC=Yes, RoHS=Compliant, Throw Configuration=SPST
U200 U201: library part CMP-00022-3, "DC Mtr Drive, Brush, 150DEGC, TSSOPEP-14 Rohs Compliant: Yes", Case/Package=14-TSSOP, Current - Output=9.2A, Manufacturer="Infineon Technologies", Operating Temperature="-40C ~ 150C", Voltage - Load="4.5V ~ 40V", Interface=SPI, Motor Type - AC, DC="Brushed DC", Mount=SMD, Output configuration="Full bridge", Part number=BTM9011EPXUMA1, REACH SVHC=Yes, RoHS=Compliant, Voltage - Supply="4.5V ~ 40V"
U300: library part CMP-00026-1, "LDO Regulator, 300 mA, Low Iq, High PSRR, High Accuracy 3.3V, TSOP5, Active Discharge, Normal Vout Slew-Rate", Case/Package=TSOP-5, Dropout Voltage=235mV, Manufacturer=onsemi, Manufacturer Lifecycle Status=ACTIVE, Max Junction Temperature (Tj)=85°C, Max Operating Temperature=150°C, Max Supply Voltage=5.5V, Min Input Voltage=3.8V, Min Supply Voltage=1.7V, Nominal Supply Current=50µA, Output Current=300mA, Output Voltage=3.3V, Voltage Tolerance=2%, Accuracy=1%, China RoHS=Compliant, Height=1.1mm, Height - Seated (Max)=1.1mm, Length=3mm, Lifecycle Status=Production, Mount=SMD, Number of Channels=1, Number of Circuits=1, Number of Outputs=1, Number of Terminals=5, Output Type=Fixed, Part number=NCP115ASN330T2G, REACH SVHC=Yes, RoHS=Compliant, Schedule B="8542390000, 8542390000", Terminal Pitch=950µm, Width=1.5mm
U301: library part CMP-00019-3, "Switching Regulator, Current-mode, 0.3A, 230kHz Switching Freq-Max, PDSO5", Case/Package=TSOT, Manufacturer="Renesas / Intersil", Manufacturer Lifecycle Status=ACTIVE, Max Junction Temperature (Tj)=125°C, Max Output Current=300mA, Max Output Voltage=5.15V, Max Supply Voltage=80V, Max Switching Frequency=230kHz, Min Input Voltage=7V, Min Operating Temperature=-40°C, Min Output Voltage=3.18V, Nominal Output Voltage=5V, Nominal Supply Voltage=18V, Package Quantity=3000, Export Control Classification Number (ECCN) Code=EAR99, Harmonized Tariff Schedule (HTS) Code=8540000000, Height=850µm, Height - Seated (Max)=1.1mm, Length=2.9mm, Lifecycle Status=Production, Max Operating Temperature=125°C, Mount=SMD, Mounting Technology="Surface Mount", MSL=3, Number of Circuits=1, Number of Terminals=5, Part Family=RAA211805, Part number=RAA2118054GP3#JA0, Pins=5, Pitch=1mm, REACH SVHC=Yes, RoHS=Compliant, Terminal Pitch=950µm, Topology=Buck, Width=1.6mm
U400: library part CMP-00012-3, "MCU 32-bit STM32F1 ARM Cortex M3 RISC 64KB Flash 2.5V/3.3V 48-Pin LQFP Tray", Case/Package=LQFP, Clock Frequency=16MHz, Frequency=72MHz, Manufacturer=STMicroelectronics, Manufacturer Package Identifier=ai14911d, Max Operating Temperature=85°C, Max Power Dissipation=363mW, Max Supply Current=50mA, Max Supply Voltage=3.6V, Min Operating Temperature=-40°C, Min Supply Voltage=2V, Nominal Supply Current=1.7µA, Operating Supply Voltage=3.3V, ADC Channels (Resolution)="10-Ch 12-Bit", Address Bus Width=32b, China RoHS=Compliant, Core Architecture=ARM, Data Bus Width=32b, Density=512kb, EEPROM Memory Size=0B, Flash Memory Size=64kB, Height=1.45mm, Height - Seated (Max)=1.6mm, Interface="CAN, USB", Lead Free="Lead Free", Length=7mm, Lifecycle Status=Production, Memory Format=FLASH, Memory Size=64kB, Mount=SMD, Mounting Technology="Surface Mount", Number of A/D Converters=2, Number of ADC Channels=10, Number of Bits=32, Number of Channels=10, Number of I2C Channels=2, Number of I/Os=37, Number of Interrupts=16, Number of Programmable I/O=48, Number of PWM Channels=1, Number of SPI Channels=2, Number of Terminals=48, Number of Timers/Counters=4, Number of USART Channels=3, Oscillator Type=Internal, Part number=STM32F103C8T6, Peripherals=POR, Pins=48, Radiation Hardening=No, RAM Size=20kB, REACH SVHC=Yes, RoHS=Compliant, Schedule B=8542310000, Terminal Pitch=500µm, Termination=SMD/SMT, Watchdog Timer=Yes, Width=7mm
U401: library part CMP-00027-2, "USB to UART 3Mbps USB 2.0 SOP-8 Interface Controllers RoHS", Case/Package=SOP-8, Manufacturer=HOLTEK, Harmonized Tariff Schedule (HTS) Code=8542.31.00.30, Introduction Date=2019-03-26, Lifecycle Status=NRND, Mount=SMD, Part number=HT42B534-2, Pins=8, RoHS=Yes
U500: library part CMP-00015-1, "433MHz reciever module, 5V tolerant", Case/Package="2.54mm 4 POS", Manufacturer=Unknown, Mount=THT, Part number="XY-MK-5V RF", RoHS=Yes
Xtal400: library part CMP-ROOT-01254-3, "Crystal 16MHz ±10ppm (Tol) ±15ppm (Stability) 12pF FUND 150Ohm 4-Pin Ultra Mini-CSMD T/R", Case/Package="4-SMD, No Lead", ESR (Equivalent Series Resistance)=150Ω, Frequency=16MHz, Frequency Stability=15ppm, Frequency Tolerance=0.001%, Load Capacitance=12pF, Manufacturer="Abracon LLC", Max Operating Temperature=85°C, Min Operating Temperature=-30°C, China RoHS=Compliant, ESR=150Ω, Height=590µm, Length=2mm, Lifecycle Status=Production, Mount=SMD, Mounting Technology="Surface Mount", REACH SVHC=Yes, RoHS=Compliant, Schedule B=8541600080, Tolerance=0.001%, Width=1.6mm

## Free pads (board coordinates)
  round 0 hole 2.4 unplated: 0(68.275,38.7)

## Via types
v1: diameter 0.7, hole 0.4, Top Layer to Bottom Layer, 196 vias

## Nets (pads, with @x,y where several pads share a name; then routed paths per layer and width w, separated by ;. In a path a pad name is that pad's centre, name@x,y a point inside that pad or via, vN(x,y) a via of type N, cw(c..) or ccw(c..) an arc to the next point about the centre after c; other vN are vias at no path point)
+3V3: C301.2 C401.1 C402.1 C403.2 C404.1 C409.1 C502.1 C503.1 C504.1 C505.1 D303.1 D401.2 J500.1 J501.1 J502.1 P500.2 P504.1 R200.2 R302.2 R400.2 R404.2 R409.2 R410.2 R502.1 U300.4 U400.1 U400.9 U400.24 U400.36 U400.48 U401.3 | length 66.4
  Top Layer w0.3: C504.1@68.4,59.75 68.4,59.55 67.81,58.96 J500.1@67.81,57.375 67.982,57.203 67.982,56.743 69.85,54.875 71.05,54.875 72.425,53.5 R404.2@73.275,53.5 ; R502.1@72.05,36.925 72.25,36.925 72.85,36.325 75.675,36.325 P504.1@77.075,37.725 ; D401.2@79.375,52.575 80.369,51.581 80.944,51.581 C409.1@81.075,51.45 82.25,51.45 U400.36@82.25,51.65 ; C403.2@80.35,41.425 C403.2@80.675,41.75 81.05,42.125 C404.1@81.05,43.55 ; U400.48@80.75,44.65 81.05,44.65 C404.1@81.05,43.55 ; J501.1@82.045,66.535 82.048,66.537 82.048,70.872 C505.1@82.05,70.875 ; U400.1@82.25,43.15 82.25,43.55 C404.1@81.05,43.55 ; U300.4@83.6,62.65 U300.4@83.625,62.675 ; U400.9@86.25,43.15 86.25,42.446 86.671,42.025 87.425,42.025 88.225,41.225 C402.1@88.225,41.025 ; U400.24@89.25,50.15 89.95,50.15 90.25,50.45 90.25,50.95 C401.1@90.3,51 ; C401.1@90.4,50.95 C401.1@90.4,51.1 90.4,50.9 90.719,50.581 90.819,50.581 v1(90.9,50.5) ; R410.2@90.775,70.1 90.975,70.1 91.125,69.95 91.125,69.816 91.301,69.64 92.351,69.64 92.43,69.562 v1(92.538,69.562) ; v1@92.569,69.592 C503.1@92.569,70.699 ; C503.1@92.6,70.699 C503.1@92.6,70.9 ; C503.1@92.65,71.15 93.3,71.8 94.375,71.8 94.95,71.225 95.025,71.225 95.175,71.075 R409.2@95.175,70.875 ; v1(95.55,56.8) 95.658,56.8 96.023,56.435 96.425,56.435 96.575,56.285 R302.2@96.575,56.15 ; D303.1@100.5,59 101.367,59 101.642,58.725 v1(101.75,58.725)
  Top Layer w0.5: D401.2@79.375,52.575 v1(79.375,56.525) 79.81,56.96 80.85,56.96 U401.3@80.925,57.035 ; v1(80.35,40.45) C403.2@80.35,41.425
  Top Layer w1: J501.1@82.045,66.535 83.625,64.955 C301.2@83.625,64.1 U300.4@83.625,62.675
  Bottom Inner Layer w0.3: v1(92.538,69.562) 93.125,68.975 J502.1@93.125,66.535
  Bottom Layer w0.3: v1(95.55,56.8) 95.591,56.841 95.591,57.291 97.025,58.725 v1(101.75,58.725)
  other v1: 88.475,40.35
+5V: C300.2 C410.2 C411.1 C500.1 C501.1 D300.1 D400.1 D401.1 P503.1 R301.1 U300.1 U300.3 U401.6 U500.1 | length 102.8
  Top Layer w0.3: C501.1@69.025,41.7 69.099,41.626 69.099,41.126 69.98,40.245 P503.1@71.075,40.245
  Top Layer w0.5: D400.1@68.325,64.1 68.325,62.775 v1(68.925,62.175) ; U401.6@75.06,57 v1(76.8,57) ; C411.1@75.125,52.25 75.125,52.363 75.175,52.413 76.613,52.413 D401.1@76.775,52.575 D401.1@76.787,52.587 ; D401.1@76.8,52.6 v1(76.8,57) ; v1(80.925,59.875) C410.2@78.95,59.875 78.9,59.825 78.9,59.1 v1(76.8,57) ; U300.3@86,62.65 86.15,62.65 86.712,63.212 86.712,63.562 v1(86.75,63.6) ; v1(95.7,55.65) 95.738,55.612 95.738,55.337 96.1,54.975 96.525,54.975 96.575,54.925 R301.1@96.575,54.725 ; U500.1@101.855,37.725 103.425,37.725 104.175,36.975 C500.1@104.175,36.775
  Bottom Inner Layer w0.5: P503.1@71.075,40.245 69.675,41.645 69.675,48.225 76.8,55.35 v1(76.8,57) ; v1(80.925,59.875) 85,59.875 ; v1(86.75,63.6) 85,61.85 85,59.875 ; v1(95.7,55.65) 93.175,55.65 ; U500.1@101.855,37.725 100.53,39.05 94.8,39.05 92.65,41.2 92.65,55.125 93.175,55.65 ; 85,59.875 85,58.325 v1(86.6,56.725) v1(87.5,56.725) 92.1,56.725 93.175,55.65
  Bottom Layer w0.5: v1(68.925,62.175) 70.2,60.9 74.1,60.9 76.8,58.2 v1(76.8,57)
+12V: C200.2 C201.2 C202.2 C203.2 C305.2 J300.1 J503.2 J504.2 R300.2 U200.11 U200.12 U201.11 U201.12 U301.3 U301.4 | length 3.9
  Top Layer w0.3: v1(104.419,51.318) 104.495,51.395 104.495,51.62 104.75,51.875 C203.2@104.95,51.875
  Top Layer w0.5: U301.3@94.35,58.95 94.35,58.65 94.4,58.6 94.55,58.6 95.55,57.6 R300.2@96.575,57.6
  other v1: 105.95,42.6 104.64,43.332 105.975,51.525 98.1,60.65 99.1,60.65 100.1,60.65 101.1,60.65 98.1,61.625 99.1,61.625 100.1,61.625 101.1,61.625
BOOT0: P504.2 R501.2 U400.44 | length 13.5
  Top Layer w0.3: P504.2@77.075,40.265 78.439,38.901 79.074,38.901 R501.2@79.175,38.8 ; v1(79.5,46.85) 79.608,46.85 79.808,46.65 U400.44@80.75,46.65
  Bottom Layer w0.3: P504.2@77.075,40.265 77.276,40.466 79.016,40.466 80.375,41.825 80.375,46.225 79.827,46.773 79.577,46.773 v1(79.5,46.85)
CS: R202.1 R203.1 U400.25 | length 7.4
  Top Layer w0.3: U400.25@87.75,51.65 87.75,51.875 91.175,51.875 91.65,51.4 91.65,50.7 91.875,50.475 92.05,50.475 92.2,50.325 R202.1@92.2,48.7
D_N: J400.A7 J400.B7 R406.1 | length 4.6
  Top Layer w0.2: R406.1@75.295,63.02 75.154,63.161 75.154,63.78 75.325,63.951 75.325,65.433 75.364,65.472 75.364,65.689 J400.A7@75.45,65.775
  Bottom Layer w0.2: J400.B7@74.6,67.125 74.686,67.039 74.686,66.789 75.364,66.111 75.364,65.861 J400.A7@75.45,65.775
D_P: J400.A6 J400.B6 R405.1 | length 4.5
  Top Layer w0.2: R405.1@73.895,63.47 73.995,63.47 74.725,64.2 74.725,65.433 74.686,65.472 74.686,65.689 J400.A6@74.6,65.775 74.686,65.861 74.686,66.111 75.364,66.789 75.364,67.039 J400.B6@75.45,67.125
DBG_LED: R303.1 U400.21 | length 16.8
  Top Layer w0.3: v1(87.2,49.8) 88.35,48.65 U400.21@89.25,48.65 ; v1(95.825,58.75) 96.425,58.75 96.575,58.9 R303.1@96.575,59
  Bottom Layer w0.3: v1(87.2,49.8) 87.2,49.908 86.95,50.158 86.95,51 94.7,58.75 v1(95.825,58.75)
EN: R401.2 U400.7 | length 8.9
  Top Layer w0.3: v1(85.075,44.475) 85.075,44.367 85.25,44.192 U400.7@85.25,43.15 ; v1(88.45,42.7) 88.558,42.7 88.808,42.95 90.025,42.95 90.7,43.625 R401.2@90.9,43.625
  Bottom Layer w0.3: v1(85.075,44.475) 85.075,43.575 85.95,42.7 v1(88.45,42.7)